# EAGLE board CT_schematic (EAGLE 7.6.0)

Size 100 x 80 mm. Coordinates in mm from the lower left corner, seen from the top.
Outline: 0,0 100,0 100,80 0,80 0,0
Copper layers (1*16): Top 0.035mm / dielectric 1.5mm / Bottom 0.035mm
Design rules "default": minimum track width 10mil, minimum drill 24mil, track to track 8mil, track to pad 8mil, pad to pad 8mil, via to via 8mil, smd to smd 8mil, copper to edge 40mil, drill to drill 8mil, minimum pad ring 10mil, minimum via ring 8mil, stop-mask expansion 4mil, vias tented up to drill 0mil, thermal gap 10mil

## Footprints (pad centres in the part's own frame; a part is rotated, then mirrored left to right if it is on the bottom)
C0603 = smd 0.8 x 0.8: 1 -0.762,0; 2 0.762,0
C0402 = smd 0.5 x 0.5: 1 -0.508,0; 2 0.508,0
C0805 = smd 1.2 x 1.3: 1 -1.016,0; 2 1.016,0
C1206 = smd 1.3 x 1.6: 1 -1.524,0; 2 1.524,0
L0603 = smd 0.8 x 0.8: 1 -0.762,0; 2 0.762,0
DR1040 = smd 1.6 x 3.2: 1 -4.458,0; 2 4.458,0
R0603 = smd 0.8 x 0.8: 1 -0.762,0; 2 0.762,0
LQFP100 = smd 0.3 x 1.2: 1 -6,-7.75; 2 -5.5,-7.75; 3 -5,-7.75; 4 -4.5,-7.75; 5 -4,-7.75; 6 -3.5,-7.75; 7 -3,-7.75; 8 -2.5,-7.75; 9 -2,-7.75; 10 -1.5,-7.75; 11 -1,-7.75; 12 -0.5,-7.75; 13 0,-7.75; 14 0.5,-7.75; 15 1,-7.75; 16 1.5,-7.75; 17 2,-7.75; 18 2.5,-7.75; 19 3,-7.75; 20 3.5,-7.75; 21 4,-7.75; 22 4.5,-7.75; 23 5,-7.75; 24 5.5,-7.75; 25 6,-7.75; 51 6,7.75; 52 5.5,7.75; 53 5,7.75; 54 4.5,7.75; 55 4,7.75; 56 3.5,7.75; 57 3,7.75; 58 2.5,7.75; 59 2,7.75; 60 1.5,7.75; 61 1,7.75; 62 0.5,7.75; 63 0,7.75; 64 -0.5,7.75; 65 -1,7.75; 66 -1.5,7.75; 67 -2,7.75; 68 -2.5,7.75; 69 -3,7.75; 70 -3.5,7.75; 71 -4,7.75; 72 -4.5,7.75; 73 -5,7.75; 74 -5.5,7.75; 75 -6,7.75 | smd 1.2 x 0.3: 26 7.75,-6; 27 7.75,-5.5; 28 7.75,-5; 29 7.75,-4.5; 30 7.75,-4; 31 7.75,-3.5; 32 7.75,-3; 33 7.75,-2.5; 34 7.75,-2; 35 7.75,-1.5; 36 7.75,-1; 37 7.75,-0.5; 38 7.75,0; 39 7.75,0.5; 40 7.75,1; 41 7.75,1.5; 42 7.75,2; 43 7.75,2.5; 44 7.75,3; 45 7.75,3.5; 46 7.75,4; 47 7.75,4.5; 48 7.75,5; 49 7.75,5.5; 50 7.75,6; 76 -7.75,6; 77 -7.75,5.5; 78 -7.75,5; 79 -7.75,4.5; 80 -7.75,4; 81 -7.75,3.5; 82 -7.75,3; 83 -7.75,2.5; 84 -7.75,2; 85 -7.75,1.5; 86 -7.75,1; 87 -7.75,0.5; 88 -7.75,0; 89 -7.75,-0.5; 90 -7.75,-1; 91 -7.75,-1.5; 92 -7.75,-2; 93 -7.75,-2.5; 94 -7.75,-3; 95 -7.75,-3.5; 96 -7.75,-4; 97 -7.75,-4.5; 98 -7.75,-5; 99 -7.75,-5.5; 100 -7.75,-6
SOIC-8 = smd 1.6 x 0.6: 1 -2.7,1.905 | smd 1.55 x 0.6: 2 -2.7,0.635; 3 -2.7,-0.635; 4 -2.7,-1.905; 5 2.7,-1.905; 6 2.7,-0.635; 7 2.7,0.635; 8 2.7,1.905
SAMTEC_FTSH-105-01-L-DV-K = smd 0.762 x 2.794: 1 -2.54,-2.032; 2 -2.54,2.032; 3 -1.27,-2.032; 4 -1.27,2.032; 5 0,-2.032; 6 0,2.032; 7 1.27,-2.032; 8 1.27,2.032; 9 2.54,-2.032; 10 2.54,2.032
SOT-23-8 = smd 0.4 x 1.2: 1 -0.975,-1.3; 2 -0.325,-1.3; 3 0.325,-1.3; 4 0.975,-1.3; 5 0.975,1.3; 6 0.325,1.3; 7 -0.325,1.3; 8 -0.975,1.3
182-009-MALE = drill 1.194 pad 1.524 octagon: 1 -5.537,10.923; 2 -2.769,10.923; 3 0,10.923; 4 2.769,10.923; 5 5.537,10.923; 6 -4.153,8.08; 7 -1.384,8.08; 8 1.384,8.08; 9 4.153,8.08 | hole 3.048: -12.446,9.501; 12.446,9.501
WNG008 = smd 0.45 x 0.55: 1 -1.27,0; 2 0,0; 3 1.27,0; 4 2.54,0; 5 2.54,7.5; 6 1.27,7.5; 7 0,7.5; 8 -1.27,7.53 | smd 4.9 x 4.75: PAD 0.635,3.75
FCI_10118193-0001LF = smd 0.4 x 1.35: 1 -1.3,2.675; 2 -0.65,2.675; 3 0,2.675; 4 0.65,2.675; 5 1.3,2.675 | smd 1.6 x 1.4: 6 -3.2,2.45; 7 3.2,2.45 | smd 1.9 x 1.9: 8 -1.2,0; 9 1.2,0 | hole 0.5: -3.3,0; 3.3,0
SOT143B = smd 1 x 0.7: 1 -0.75,-1 | smd 0.6 x 0.7: 2 0.95,-1; 3 0.95,1; 4 -0.95,1
ASEK = smd 1.4 x 1: 1 -1.1,-0.8; 2 1.1,-0.8; 3 1.1,0.8; 4 -1.1,0.8
ASFL1 = smd 1.7 x 1.5: 1 -1.27,-1.1; 2 1.27,-1.1; 3 1.27,1.1; 4 -1.27,1.1
TSOT-23-5 = smd 1.3 x 0.62: 1 -1.31,0.95; 2 -1.31,0; 3 -1.31,-0.95; 4 1.31,-0.95; 5 1.31,0.95
DFN8_2X3MC = smd 0.813 x 0.305: 1 -1.398,0.75; 2 -1.398,0.25; 3 -1.398,-0.25; 4 -1.398,-0.75; 5 1.398,-0.75; 6 1.398,-0.25; 7 1.398,0.25; 8 1.398,0.75 | smd 1.753 x 1.549: 9 0,0
JST-2-SMD = smd 1 x 4.6: 1 -1,-3.7; 2 1,-3.7 | smd 1.6 x 3.4: NC1 -3.4,1.5; NC2 3.4,1.5
SON-6 = smd 0.55 x 0.3: 1 -0.355,0.5 | smd 0.52 x 0.3: 2 -0.37,0; 3 -0.37,-0.5; 4 0.37,-0.5; 5 0.37,0; 6 0.37,0.5
SW_4-1437565-2 = smd 1.4 x 2.1: 1 -2.23,4.55; 2 -2.23,-4.55; 3 2.23,4.55; 4 2.23,-4.55
LGM67K-G1J2-24-Z = smd 0.8 x 1.4: A -2,0; C 0,0
NC7SZ125M5X = smd 1.3 x 0.7: 1 -1.3,0.95; 2 -1.3,0; 3 -1.3,-0.95; 4 1.3,-0.95; 5 1.3,0.95

## Placement (x,y rotation side)
C1  1e-06  [C0603]  -30.48,71.12 0 top  (outside the outline)
C2  1e-07  [C0603]  -34.29,71.12 0 top  (outside the outline)
C3  1e-07  [C0603]  -38.1,71.12 0 top  (outside the outline)
C4  1e-07  [C0603]  -41.91,71.12 0 top  (outside the outline)
C5  1e-07  [C0603]  -45.72,71.12 0 top  (outside the outline)
C6  1e-07  [C0603]  -49.53,71.12 0 top  (outside the outline)
C7  1e-07  [C0603]  -53.34,71.12 0 top  (outside the outline)
C8  4.7e-06  [C0603]  -19.05,71.12 0 top  (outside the outline)
C9  2.2e-06  [C0603]  -22.86,71.12 0 top  (outside the outline)
C10  2.2e-06  [C0603]  -26.67,71.12 0 top  (outside the outline)
C11  1e-08  [C0603]  -57.15,71.12 0 top  (outside the outline)
C12  1e-06  [C0603]  -60.96,71.12 0 top  (outside the outline)
C13  1e-06  [C0603]  -64.77,71.12 0 top  (outside the outline)
C14  1e-08  [C0402]  -30.48,76.2 0 top  (outside the outline)
C15  1e-07  [C0402]  -34.29,76.2 0 top  (outside the outline)
C16  1e-07  [C0402]  -38.1,76.2 0 top  (outside the outline)
C17  1e-08  [C0402]  -41.91,76.2 0 top  (outside the outline)
C18  1e-08  [C0402]  -45.72,76.2 0 top  (outside the outline)
C19  1e-08  [C0402]  -49.53,76.2 0 top  (outside the outline)
C20  1e-05  [C0805]  -45.72,60.96 0 top  (outside the outline)
C21  1e-05  [C0805]  -50.8,60.96 0 top  (outside the outline)
C22  1e-07  [C0402]  -53.34,76.2 0 top  (outside the outline)
C23  1e-05  [C1206]  -16.51,60.96 0 top  (outside the outline)
C24  1e-05  [C1206]  -22.86,60.96 0 top  (outside the outline)
C25  1e-08  [C0402]  -57.15,76.2 0 top  (outside the outline)
C26  1e-08  [C0402]  -60.96,76.2 0 top  (outside the outline)
F1  240.0  [L0603]  -68.58,71.12 0 top  (outside the outline)
I1  2.5e-06  [DR1040]  -67.31,27.94 0 top  (outside the outline)
R2  1000.0  [R0603]  -72.39,71.12 0 top  (outside the outline)
R4  4700.0  [R0603]  -76.2,71.12 0 top  (outside the outline)
R5  10000.0  [R0603]  -20.32,66.04 0 top  (outside the outline)
R6  10000.0  [R0603]  -25.4,66.04 0 top  (outside the outline)
R7  10000.0  [R0603]  -30.48,66.04 0 top  (outside the outline)
R8  10000.0  [R0603]  -35.56,66.04 0 top  (outside the outline)
R9  10000.0  [R0603]  -40.64,66.04 0 top  (outside the outline)
R10  10000.0  [R0603]  -45.72,66.04 0 top  (outside the outline)
R11  10000.0  [R0603]  -50.8,66.04 0 top  (outside the outline)
R12  5.0  [R0603]  -15.24,76.2 0 top  (outside the outline)
R13  120.0  [R0603]  -19.05,76.2 0 top  (outside the outline)
R14  10000.0  [R0603]  -55.88,66.04 0 top  (outside the outline)
R15  10000.0  [R0603]  -60.96,66.04 0 top  (outside the outline)
R16  10000.0  [R0603]  -66.04,66.04 0 top  (outside the outline)
R17  220000.0  [R0603]  -68.58,59.69 0 top  (outside the outline)
R18  1000000.0  [R0603]  -63.5,59.69 0 top  (outside the outline)
R19  10000.0  [R0603]  -71.12,66.04 0 top  (outside the outline)
R20  10000.0  [R0603]  -76.2,66.04 0 top  (outside the outline)
R21  9100.0  [R0603]  -22.86,76.2 0 top  (outside the outline)
R22  680000.0  [R0603]  -73.66,59.69 0 top  (outside the outline)
R23  120000.0  [R0603]  -15.24,66.04 0 top  (outside the outline)
R24  2000.0  [R0603]  -26.67,76.2 0 top  (outside the outline)
R25  10000.0  [R0603]  -15.24,71.12 0 top  (outside the outline)
U1  STM32F415VGT6  [LQFP100]  -63.5,8.89 0 top  (outside the outline)
U2  AT25320B-SSHL-T  [SOIC-8]  -58.42,41.91 0 top  (outside the outline)
U3  FTSH-105-01-L-DV-K  [SAMTEC_FTSH-105-01-L-DV-K]  -35.56,30.48 0 top  (outside the outline)
U4  MAX3051EKA+T  [SOT-23-8]  -27.94,59.69 0 top  (outside the outline)
U5  182-009-113R531  [182-009-MALE]  -36.83,6.35 0 top  (outside the outline)
U6  S25FL128SDPNFI001  [WNG008]  -29.21,40.64 0 top  (outside the outline)
U7  10118193-0001LF  [FCI_10118193-0001LF]  -35.56,52.07 0 top  (outside the outline)
U8  prtr5v0u2ax  [SOT143B]  -73.66,76.2 0 top  (outside the outline)
U9  ASEK-32.768KHz-ECST  [ASEK]  -57.15,53.34 0 top  (outside the outline)
U10  ASFL1-25MHZ-NCS  [ASFL1]  -26.67,53.34 0 top  (outside the outline)
U11  ltc3406es5  [TSOT-23-5]  -55.88,59.69 0 top  (outside the outline)
U12  MCP73831T-2ACI/MC  [DFN8_2X3MC]  -20.32,80.01 0 top  (outside the outline)
U13  S2B-PH-SM4-TB(LF)(SN)  [JST-2-SMD]  -41.91,44.45 0 top  (outside the outline)
U14  TPS3895ADRYR  [SON-6]  -13.97,80.01 0 top  (outside the outline)
U15  4-1437565-2  [SW_4-1437565-2]  -57.15,27.94 0 top  (outside the outline)
U16  Q65110A2395  [LGM67K-G1J2-24-Z]  -64.77,52.07 0 top  (outside the outline)
U17  nc7sz125m5x  [NC7SZ125M5X]  -33.02,59.69 0 top  (outside the outline)
U18  nc7sz125m5x  [NC7SZ125M5X]  -39.37,59.69 0 top  (outside the outline)

## Library data of the parts
C1-C26 F1 I1 R2 R4-R25 U1-U18 = circuit_tree

## Nets
CLK_U1_8: U1.8 U9.3
CLK_U1_12: U1.12 U10.3
GND: C1.2 C2.2 C3.2 C4.2 C5.2 C6.2 C7.2 C8.2 C9.2 C10.2 C11.2 C12.2 C13.2 C14.2 C15.2 C16.2 C17.2 C18.2 C19.2 C20.2 C21.1 C21.2 C22.2 C23.2 C24.2 C25.2 C26.2 R2.2 R5.2 R12.2 R17.2 R21.2 R23.2 R24.2 U1.10 U1.20 U1.27 U1.70 U1.74 U1.99 U2.4 U3.3 U3.5 U4.2 U4.8 U5.5 U6.4 U6.PAD U7.5 U7.6 U7.7 U7.8 U7.9 U8.1 U9.2 U10.2 U11.2 U12.6 U12.9 U13.2 U14.2 U16.C U17.2 U17.3 U18.1 U18.3
INPUT_USBPOWER_5V: C13.1 C23.1 R25.2 U1.68 U7.1 U8.4 U12.1 U12.2
NET_U1_14: R4.1 U1.14 U18.4
NET_U1_22: C11.1 C12.1 F1.1 U1.21 U1.22
NET_U1_49: C9.1 U1.49
NET_U1_73: C10.1 U1.73
NET_U1_94: R5.1 U1.94
NET_U1_97: U16.A
NET_U1_98: U15.3 U15.4
NET_U2_3: R6.1 U2.3
NET_U2_7: R8.1 U2.7
NET_U3_9: R12.1 U3.9
NET_U4_6: R13.2 U4.6
NET_U5_2: R13.2 U4.6 U5.2
NET_U5_3: R13.1 U4.7 U5.3
NET_U6_3: R14.1 U6.3
NET_U6_7: R16.1 U6.7
NET_U11_1: U11.1
NET_U11_3: I1.1 U11.3
NET_U11_5: R17.1 R18.1 U11.5
NET_U11_ATNET_3: I1.2 R18.2
NET_U12_5: R25.1 U12.5
NET_U12_8: R24.1 U12.8
NET_U14_1: R20.1 R21.1 U14.1
NET_U14_3: R22.2 R23.1 U14.3
NET_U14_4: R19.1 U14.4 U17.4 U18.2
NET_U15_1: R2.1 U15.1 U15.2
PROC_CAN1_RX: U1.81 U4.4
PROC_CAN1_TX: U1.82 U4.1
PROC_SPI1_MISO: U1.31 U2.2
PROC_SPI1_MOSI: U1.32 U2.5
PROC_SPI1_NSS: R7.1 U1.29 U2.1
PROC_SPI1_SCK: U1.30 U2.6
PROC_SPI2_MISO: U1.17 U6.2
PROC_SPI2_MOSI: U1.18 U6.5
PROC_SPI2_NSS: R15.1 U1.51 U6.1
PROC_SPI2_SCK: U1.47 U6.6
PROC_SYS_JTCK_SWCLK: R10.1 U1.76 U3.4
PROC_SYS_JTDO_SWO: U1.89 U3.6
PROC_SYS_JTMS_SWDIO: R11.1 U1.72 U3.2
PROC_USB_OTG_FS_DM: U1.70 U7.2 U8.3
PROC_USB_OTG_FS_DP: U1.71 U7.3 U8.2
RST_OUT_U3_JTAG_RST_B: R9.1 U3.10 U17.1
VCC_S1_3V7: C20.1 C24.1 U11.4 U12.3 U12.4 U13.1
VCC_TIER1_3V3: C1.1 C2.1 C3.1 C4.1 C5.1 C6.1 C7.1 C8.1 C14.1 C15.1 C16.1 C17.1 C18.1 C19.1 C21.2 C22.1 C25.1 C26.1 F1.2 I1.2 R4.2 R6.2 R7.2 R8.2 R9.2 R10.2 R11.2 R14.2 R15.2 R16.2 R18.2 R19.2 R20.2 R22.1 U1.6 U1.11 U1.19 U1.28 U1.50 U1.75 U1.100 U2.8 U3.1 U4.3 U6.8 U9.4 U10.4 U14.6 U17.5 U18.5

## Tracks (layer width: path | path; a pad name or v marks a point on that pad's centre or on a via)
CLK_U1_8  (1 unrouted)
CLK_U1_12  (1 unrouted)
GND  (65 unrouted)
INPUT_USBPOWER_5V  (7 unrouted)
NET_U1_14  (2 unrouted)
NET_U1_22  (4 unrouted)
NET_U1_49  (1 unrouted)
NET_U1_73  (1 unrouted)
NET_U1_94  (1 unrouted)
NET_U1_98  (1 unrouted)
NET_U2_3  (1 unrouted)
NET_U2_7  (1 unrouted)
NET_U3_9  (1 unrouted)
NET_U4_6  (1 unrouted)
NET_U5_2  (2 unrouted)
NET_U5_3  (2 unrouted)
NET_U6_3  (1 unrouted)
NET_U6_7  (1 unrouted)
NET_U11_3  (1 unrouted)
NET_U11_5  (2 unrouted)
NET_U11_ATNET_3  (1 unrouted)
NET_U12_5  (1 unrouted)
NET_U12_8  (1 unrouted)
NET_U14_1  (2 unrouted)
NET_U14_3  (2 unrouted)
NET_U14_4  (3 unrouted)
NET_U15_1  (2 unrouted)
PROC_CAN1_RX  (1 unrouted)
PROC_CAN1_TX  (1 unrouted)
PROC_SPI1_MISO  (1 unrouted)
PROC_SPI1_MOSI  (1 unrouted)
PROC_SPI1_NSS  (2 unrouted)
PROC_SPI1_SCK  (1 unrouted)
PROC_SPI2_MISO  (1 unrouted)
PROC_SPI2_MOSI  (1 unrouted)
PROC_SPI2_NSS  (2 unrouted)
PROC_SPI2_SCK  (1 unrouted)
PROC_SYS_JTCK_SWCLK  (2 unrouted)
PROC_SYS_JTDO_SWO  (1 unrouted)
PROC_SYS_JTMS_SWDIO  (2 unrouted)
PROC_USB_OTG_FS_DM  (2 unrouted)
PROC_USB_OTG_FS_DP  (2 unrouted)
RST_OUT_U3_JTAG_RST_B  (2 unrouted)
VCC_S1_3V7  (5 unrouted)
VCC_TIER1_3V3  (49 unrouted)